# EAGLE board BSK5 (EAGLE 9.4.2)
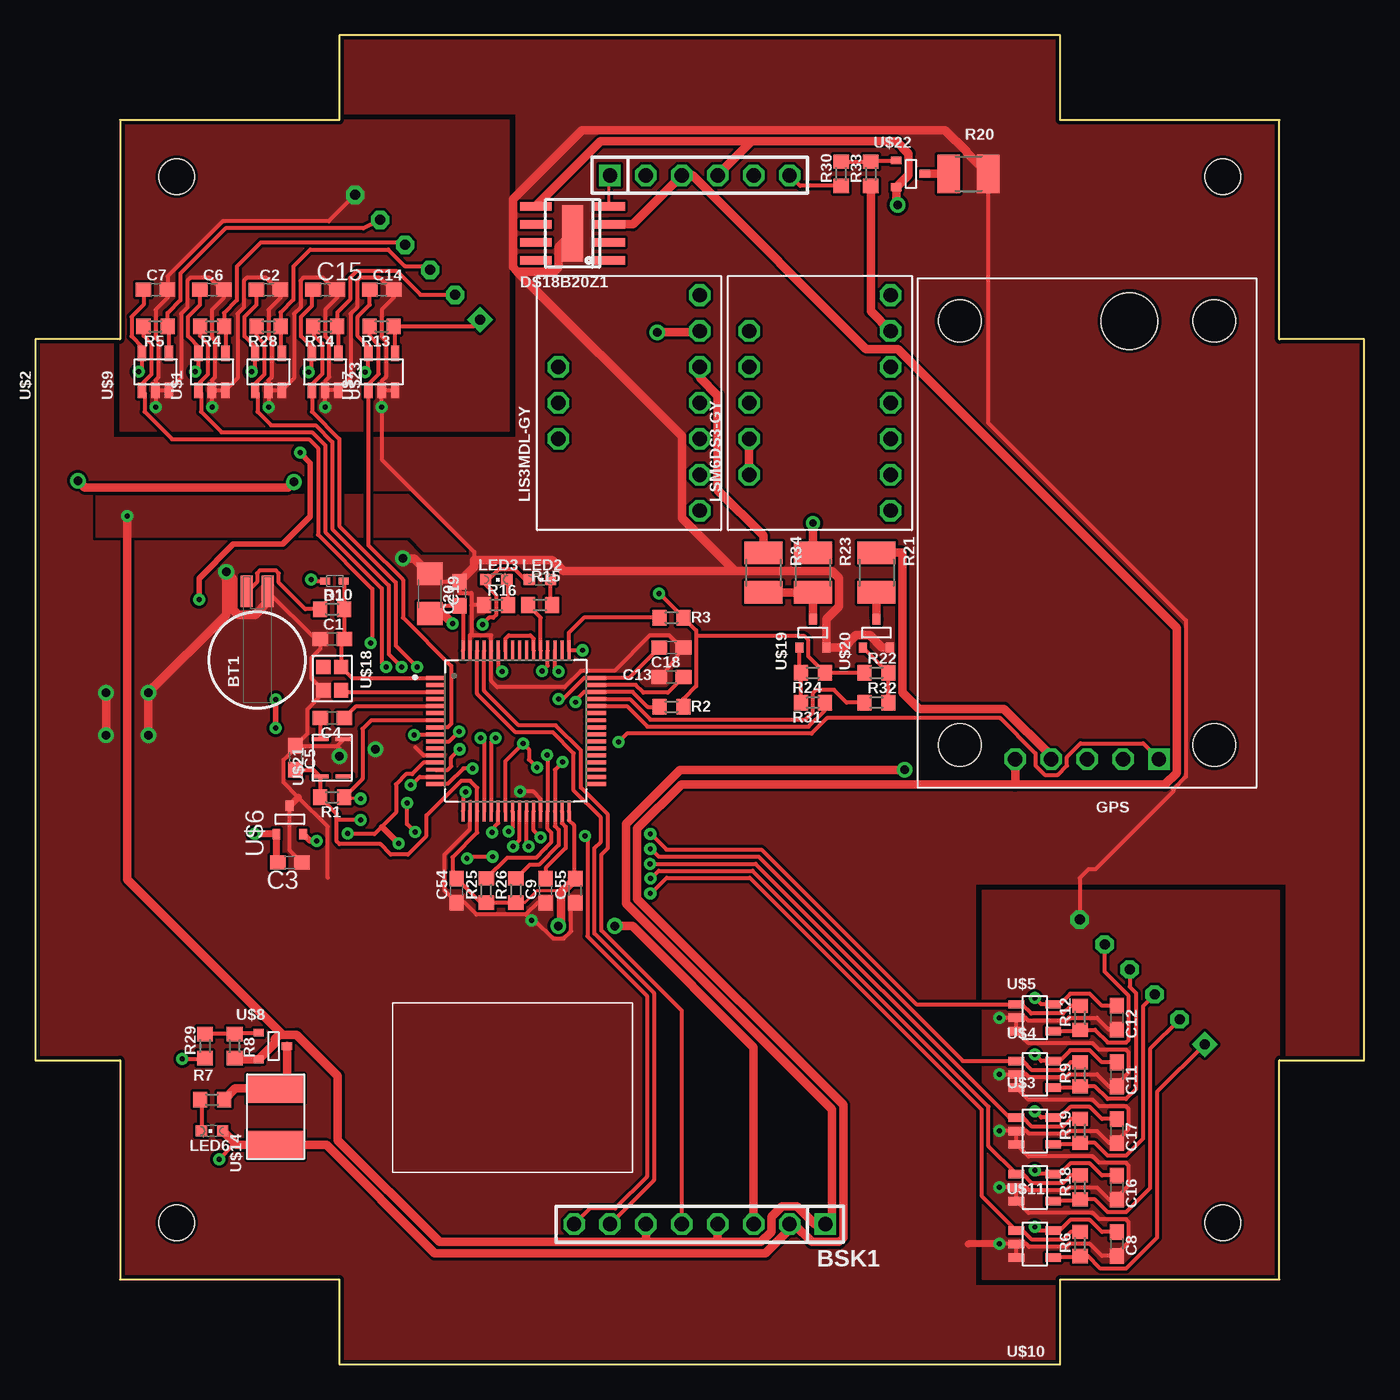
[diagram p0: board, top side]
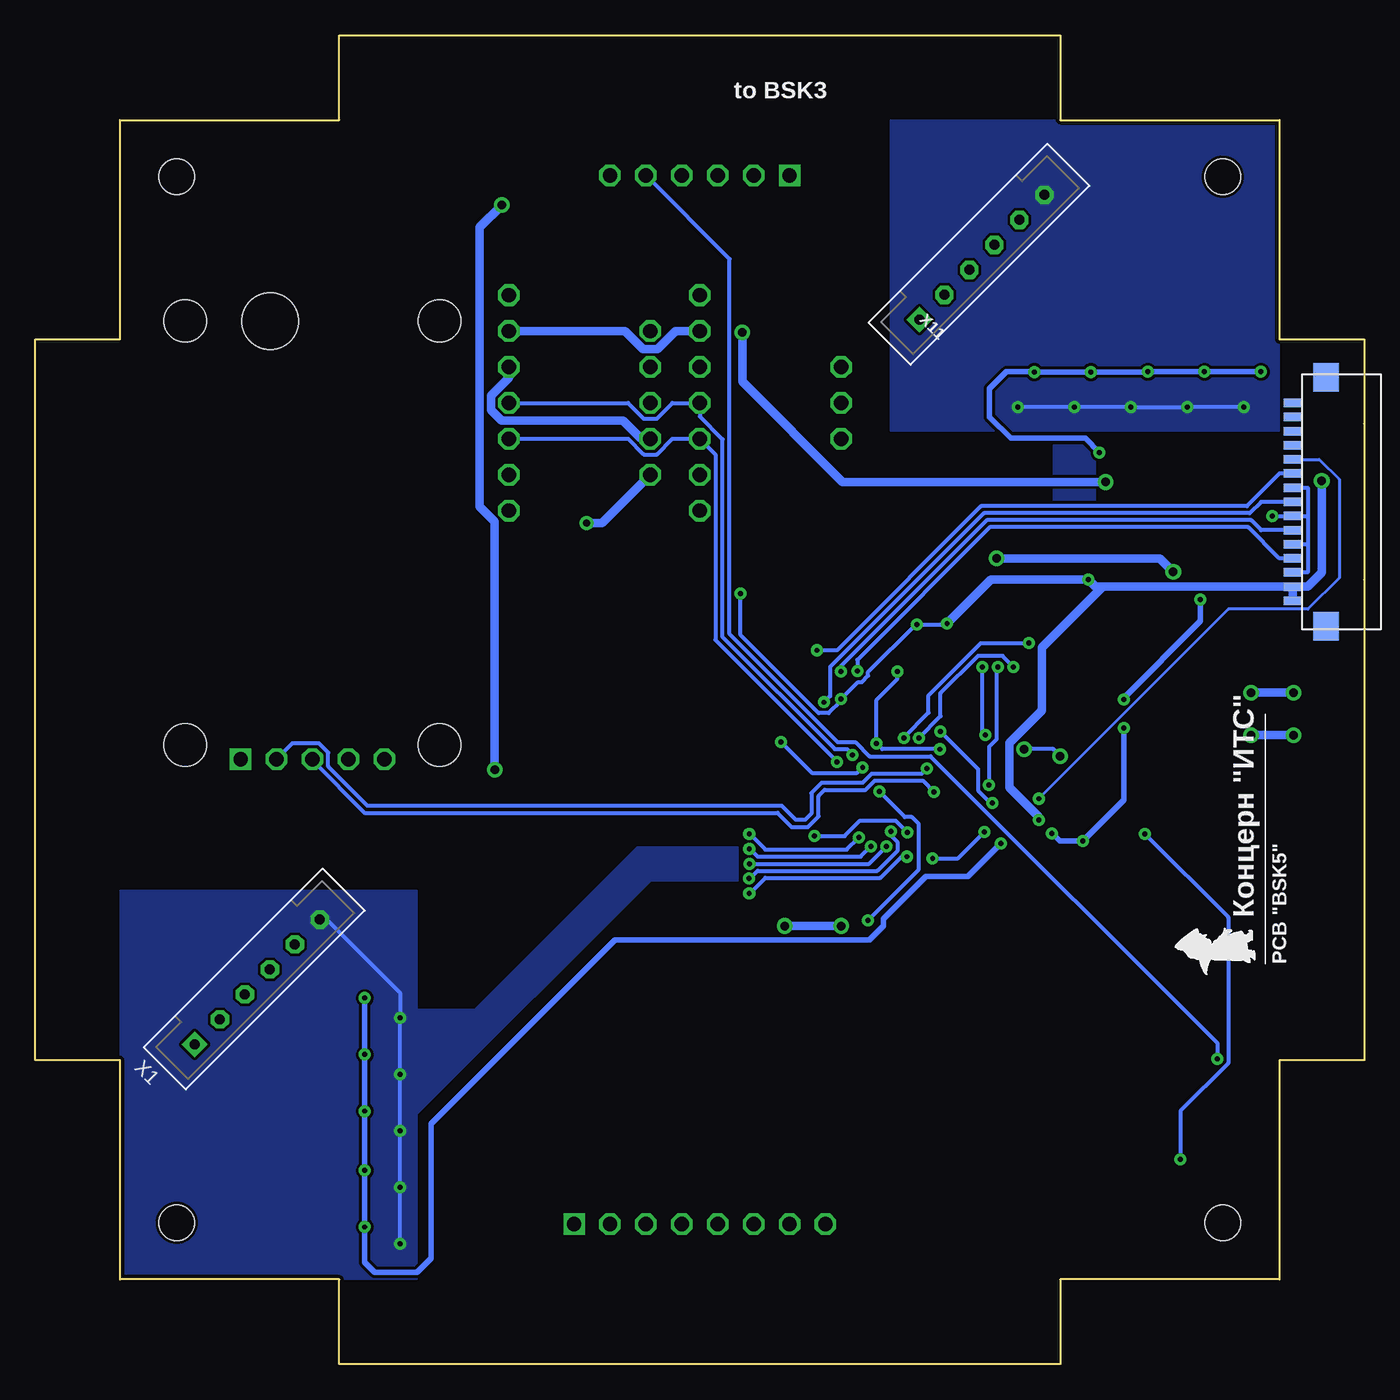
[diagram p1: board, bottom side, seen from below]

Size 94 x 94 mm. Coordinates in mm from the lower left corner, seen from the top.
Outline: 21.5,0 72.5,0 72.5,6 88,6 88,21.5 94,21.5 94,72.5 88,72.5 88,88 72.5,88 72.5,94 21.5,94 21.5,88 6,88 6,72.5 0,72.5 0,66.5 0,55.5 0,21.5 6,21.5 6,6 21.5,6 21.5,0
Copper layers (1*16): Top 0.035mm / dielectric 1.5mm / Bottom 0.035mm
Design rules "default *": minimum track width 0.2mm, minimum drill 0.35mm, track to track 0.2mm, track to pad 0.2mm, pad to pad 0.2mm, via to via 0.2mm, smd to smd 0.2mm, copper to edge 0.25mm, drill to drill 0.1mm, minimum pad ring 0.2mm, minimum via ring 0.25mm, stop-mask expansion 0.05mm, vias tented up to drill 0mil, thermal gap 10mil
Holes 2.5 mm at 10,10 84,84 10,84 84,10

## Footprints (pad centres in the part's own frame; a part is rotated, then mirrored left to right if it is on the bottom)
1X08 = drill 1.016 square: 1 -8.89,0 | drill 1.016 octagon: 2 -6.35,0; 3 -3.81,0; 4 -1.27,0; 5 1.27,0; 6 3.81,0; 7 6.35,0; 8 8.89,0
1X06 = drill 1.016 square: 1 -6.35,0 | drill 1.016 octagon: 2 -3.81,0; 3 -1.27,0; 4 1.27,0; 5 3.81,0; 6 6.35,0
BATTCON-6.8MM = smd 2.25 x 0.85: + 4.87,0.75; - 4.87,-0.75
C0603 = smd 1.1 x 1: 1 -0.85,0; 2 0.85,0
C1206 = smd 1.6 x 1.8: 1 -1.4,0; 2 1.4,0
SOD523 = smd 0.7 x 0.5: A 0.7,0; C -0.6,0
SOIC8+HEAT_S = smd 0.6 x 2.2: 1 -1.905,-2.6; 2 -0.635,-2.6; 3 0.635,-2.6; 4 1.905,-2.6; 5 1.905,2.6; 6 0.635,2.6; 7 -0.635,2.6; 8 -1.905,2.6 | smd 4 x 1.5: HEAT 0,0
GPS-NEO6M = drill 1.016 square: P$1 -5.08,16 | drill 1.016 octagon: P$2 -2.54,16; P$3 0,16; P$4 2.54,16; P$5 5.08,16 | hole 3: -9,15; 9,15; -9,-15; 9,-15 | hole 4: -3,-15
CHIPLED_0603 = smd 0.8 x 0.8: A 0,-0.75; C 0,0.75
LIS3MDL-GY = drill 1.016 octagon: P$1 -7.62,-5; P$2 -5.08,-5; P$3 -2.54,-5; P$4 0,-5; P$5 2.54,-5; P$6 5.08,-5; P$7 7.62,-5; P$8 -2.54,5; P$9 0,5; P$10 2.54,5
LSM6DS3-GY = drill 1.016 octagon: P$1 -7.62,-5; P$2 -5.08,-5; P$3 -2.54,-5; P$4 0,-5; P$5 2.54,-5; P$6 5.08,-5; P$7 7.62,-5; P$8 -5.08,5; P$9 -2.54,5; P$10 0,5; P$11 2.54,5; P$12 5.08,5
R0603 = smd 1 x 1.1: 1 -0.85,0; 2 0.85,0
R1210 = smd 1.6 x 2.7: 1 -1.4,0; 2 1.4,0
QFP50P1200X1200X160-64N = smd 1.47 x 0.28: 1 -5.67,3.75; 2 -5.67,3.25; 3 -5.67,2.75; 4 -5.67,2.25; 5 -5.67,1.75; 6 -5.67,1.25; 7 -5.67,0.75; 8 -5.67,0.25; 9 -5.67,-0.25; 10 -5.67,-0.75; 11 -5.67,-1.25; 12 -5.67,-1.75; 13 -5.67,-2.25; 14 -5.67,-2.75; 15 -5.67,-3.25; 16 -5.67,-3.75; 33 5.67,-3.75; 34 5.67,-3.25; 35 5.67,-2.75; 36 5.67,-2.25; 37 5.67,-1.75; 38 5.67,-1.25; 39 5.67,-0.75; 40 5.67,-0.25; 41 5.67,0.25; 42 5.67,0.75; 43 5.67,1.25; 44 5.67,1.75; 45 5.67,2.25; 46 5.67,2.75; 47 5.67,3.25; 48 5.67,3.75 | smd 0.28 x 1.47: 17 -3.75,-5.67; 18 -3.25,-5.67; 19 -2.75,-5.67; 20 -2.25,-5.67; 21 -1.75,-5.67; 22 -1.25,-5.67; 23 -0.75,-5.67; 24 -0.25,-5.67; 25 0.25,-5.67; 26 0.75,-5.67; 27 1.25,-5.67; 28 1.75,-5.67; 29 2.25,-5.67; 30 2.75,-5.67; 31 3.25,-5.67; 32 3.75,-5.67; 49 3.75,5.67; 50 3.25,5.67; 51 2.75,5.67; 52 2.25,5.67; 53 1.75,5.67; 54 1.25,5.67; 55 0.75,5.67; 56 0.25,5.67; 57 -0.25,5.67; 58 -0.75,5.67; 59 -1.25,5.67; 60 -1.75,5.67; 61 -2.25,5.67; 62 -2.75,5.67; 63 -3.25,5.67; 64 -3.75,5.67
LMC7101 = smd 1.1 x 0.6: P$1 -1.3,0.95; P$2 -1.3,0; P$3 -1.3,-0.95; P$4 1.3,-0.95; P$5 1.3,0.95
SOT23-3 = smd 0.56 x 0.73: 1 -0.95,-1; 2 0.95,-1; 3 0,1
68611 = smd 0.6 x 1.3: P$1 -7,0.65; P$2 -6,0.65; P$3 -5,0.65; P$4 -4,0.65; P$5 -3,0.65; P$6 -2,0.65; P$7 -1,0.65; P$8 0,0.65; P$9 1,0.65; P$10 2,0.65; P$11 3,0.65; P$12 4,0.65; P$13 5,0.65; P$14 6,0.65; P$15 7,0.65 | smd 2 x 1.8: P$16 8.8,-1.7; P$17 -8.8,-1.7
EM_HEAT = smd 2 x 4: 1 -2,0; 2 2,0
Q32.768 = smd 1 x 1: P$1 -0.825,-0.625; P$2 0.825,-0.625; P$3 0.825,0.625; P$4 -0.825,0.625
Q24 = smd 0.3 x 1.2: P$1 -1.325,-0.85; P$2 1.325,-0.85; P$3 1.325,0.85; P$4 -1.325,0.85
B6B-EH-A = drill 0.7 pad 1.3 square: 1 6.25,0 | drill 0.7 pad 1.3 octagon: 2 3.75,0; 3 1.25,0; 4 -1.25,0; 5 -3.75,0; 6 -6.25,0

## Placement (x,y rotation side)
BSK1  [1X08]  47,9.9 180 top
BSK3  [1X06]  47,84.1 0 top
BT1  6.8MM_COIN_CELL  [BATTCON-6.8MM]  15.7,49.8 90 top
C1  10nF  [C0603]  21,51.3 0 top
C2  100nF  [C0603]  16.5,76 0 top
C3  470nF  [C0603]  18,35.5 180 top
C4  1nF  [C0603]  21,45.7 180 top
C5  10nF  [C0603]  18.4,42.9 270 top
C6  100nF  [C0603]  12.5,76 0 top
C7  100nF  [C0603]  8.5,76 0 top
C8  100nF  [C0603]  76.5,8.5 270 top
C9  2,2µ  [C0603]  36.1,33.5 90 top
C11  100nF  [C0603]  76.5,20.5 270 top
C12  100nF  [C0603]  76.5,24.5 270 top
C13  2,2µ  [C0603]  45,48.6 0 top
C14  100nF  [C0603]  24.5,76 0 top
C15  100nF  [C0603]  20.5,76 0 top
C16  100nF  [C0603]  76.5,12.5 270 top
C17  100nF  [C0603]  76.5,16.5 270 top
C18  100nF  [C0603]  45,50.7 180 top
C19  10µ  [C1206]  27.9,54.5 270 top
C20  100nF  [C0603]  30,54.5 270 top
C54  100nF  [C0603]  29.8,33.5 90 top
C55  100nF  [C0603]  38.2,33.5 90 top
D1  BB141  [SOD523]  21.2,55.4 180 top
DS18B20Z1  DS18B20Z  [SOIC8+HEAT_S]  38,80 90 top
GPS  GPSNEO6M  [GPS-NEO6M]  74.4,58.8 180 top
LED2  [CHIPLED_0603]  35.7,55.5 270 top
LED3  [CHIPLED_0603]  32.6,55.5 270 top
LED6  [CHIPLED_0603]  12.5,16.5 90 top
LIS3MDL-GY  LIS3MDL-GY  [LIS3MDL-GY]  42,68 90 top
LSM6DS3-GY  LSM6DS3-GY  [LSM6DS3-GY]  55.5,68 90 top
R1  10k  [R0603]  21,40.1 180 top
R2  10k  [R0603]  45,46.5 0 top
R3  10k  [R0603]  45,52.8 0 top
R4  24k9  [R0603]  12.5,73.4 180 top
R5  24k9  [R0603]  8.5,73.4 180 top
R6  24k9  [R0603]  73.9,8.5 90 top
R7  2k  [R0603]  12.5,18.7 0 top
R8  1M  [R0603]  14.1,22.5 270 top
R9  24k9  [R0603]  73.9,20.5 90 top
R10  620R  [R0603]  21,53.4 0 top
R12  24k9  [R0603]  73.9,24.5 90 top
R13  24k9  [R0603]  24.5,73.4 180 top
R14  24k9  [R0603]  20.5,73.4 180 top
R15  2k  [R0603]  35.7,53.7 0 top
R16  2k  [R0603]  32.6,53.7 0 top
R18  24k9  [R0603]  73.9,12.5 90 top
R19  24k9  [R0603]  73.9,16.5 90 top
R20  0.5A  [R1210]  66,84.2 0 top
R21  0.2A  [R1210]  59.5,56 270 top
R22  1M  [R0603]  59.5,48.9 0 top
R23  0.05A  [R1210]  55,56 270 top
R24  1M  [R0603]  55,48.9 180 top
R25  5k1  [R0603]  31.9,33.5 90 top
R26  5k1  [R0603]  34,33.5 90 top
R28  24k9  [R0603]  16.5,73.4 180 top
R29  100R  [R0603]  12,22.5 90 top
R30  100R  [R0603]  57,84.2 90 top
R31  100R  [R0603]  55,46.8 180 top
R32  100R  [R0603]  59.5,46.8 0 top
R33  1M  [R0603]  59.1,84.2 90 top
R34  0.05A  [R1210]  51.5,56 270 top
U1  STM32F405RGT6  [QFP50P1200X1200X160-64N]  34,44.8 0 top
U$1  LMC7101  [LMC7101]  12.5,70.2 90 top
U$2  LMC7101  [LMC7101]  8.5,70.2 90 top
U$3  LMC7101  [LMC7101]  70.7,8.5 0 top
U$4  LMC7101  [LMC7101]  70.7,20.5 0 top
U$5  LMC7101  [LMC7101]  70.7,24.5 0 top
U$6  REF3033  [SOT23-3]  18,38.5 0 top
U$7  LMC7101  [LMC7101]  24.5,70.2 90 top
U$8  SI2302CDS  [SOT23-3]  16.8,22.5 270 top
U$9  LMC7101  [LMC7101]  20.5,70.2 90 top
U$10  LMC7101  [LMC7101]  70.7,12.5 0 top
U$11  LMC7101  [LMC7101]  70.7,16.5 0 top
U$12  FFC-CONNECT68611  [68611]  4.4,61 90 bottom
U$14  EM_HEAT  [EM_HEAT]  17,17.5 90 top
U$18  Q32.768  [Q32.768]  21,48.5 270 top
U$19  SI2302CDS  [SOT23-3]  55,51.7 0 top
U$20  SI2302CDS  [SOT23-3]  59.5,51.7 0 top
U$21  Q24  [Q24]  21,42.9 90 top
U$22  SI2302CDS  [SOT23-3]  61.9,84.2 270 top
U$23  LMC7101  [LMC7101]  16.5,70.2 90 top
U$26  PCB "BSK5"  [ITS-LOGO]  7,28.3 90 bottom
X1  JST-6A  [B6B-EH-A]  78.3,27.04 225 bottom
X11  JST-6A  [B6B-EH-A]  27.04,78.3 225 bottom

## Library data of the parts
BSK1 BSK3 = pinheadCS
BT1 = SparkFun-Batteries; PROD_ID: BATT-13734
C1-C9 C11-C20 C54 C55 = rcl; SPICEPREFIX: C
D1 = diode
DS18B20Z1 GPS LIS3MDL-GY LSM6DS3-GY U$1-U$12 U$14 U$18-U$23 U$26 X1 X11 = CanCubeSat
LED2 LED3 LED6 = led
R1-R10 R12-R16 R18 R19 R22 R24-R26 R28-R33 = resistor
R20 R21 R23 R34 = rcl; SPICEPREFIX: R
U1 = STM32F405RGT6; DESCRIPTION: High-performance foundation line, ARM Cortex-M4 core with DSP and FPU, 1 Mbyte Flash, 168 MHz CPU, ART Accelerator; DIGI-KEY_PART_NUMBER: 497-11767-ND; DIGI-KEY_PURCHASE_URL: https://www.digikey.com/product-detail/en/stmicroelectronics/STM32F405RGT6/497-11767-ND/2754208?utm_source=snapeda&utm_medium=aggregator&utm_campaign=symbol; MF: STMicroelectronics; MP: STM32F405RGT6; PACKAGE: LQFP-64 STMicroelectronics

## Nets
1: R7.2 U$8.3 U$14.2
1W: BSK3.1 DS18B20Z1.4
3V3: BSK1.3 C5.2 C18.2 C19.2 C20.2 C54.2 C55.2 D1.A LED2.A LED3.A LIS3MDL-GY.P$6 LSM6DS3-GY.P$6 R1.2 R2.2 R3.2 R22.1 R24.1 R25.1 R26.1 R33.1 U1.19 U1.32 U1.48 U1.64 U$12.P$1 U$12.P$2 U$21.P$4
3V3-STAB: C2.1 C6.1 C7.1 C8.1 C11.1 C12.1 C14.1 C15.1 C16.1 C17.1 U1.13 U$1.P$5 U$2.P$5 U$3.P$5 U$4.P$5 U$5.P$5 U$6.2 U$7.P$5 U$9.P$5 U$10.P$5 U$11.P$5 U$23.P$5
5V: BSK1.2 BSK3.3 C3.2 DS18B20Z1.3 GPS.P$5 LED6.A U$6.1 U$14.1
B5-KHEAT: BSK3.5 R29.1
BUS+: BSK3.2
CELL: C1.2 D1.C R10.2 U1.1 U$18.P$4
GND: BT1.- C1.1 C2.2 C3.1 C5.1 C6.2 C7.2 C8.2 C9.1 C11.2 C12.2 C13.1 C14.2 C15.2 C16.2 C17.2 C18.1 C19.1 C20.1 C54.1 C55.1 DS18B20Z1.HEAT R16.1 R20.2 U1.12 U1.18 U1.28 U1.60 U1.63 U$1.P$2 U$1.P$3 U$2.P$2 U$2.P$3 U$3.P$2 U$3.P$3 U$4.P$2 U$4.P$3 U$5.P$2 U$5.P$3 U$6.3 U$7.P$2 U$7.P$3 U$9.P$2 U$9.P$3 U$10.P$2 U$10.P$3 U$11.P$2 U$11.P$3 U$18.P$2 U$19.2 U$20.2 U$21.P$2 U$23.P$2 U$23.P$3 X1.6 X11.6
GND-GPS: R21.2 U$20.3
GND-MAG: R23.2 R34.2 U$19.3
GND-OUT: BSK1.1 BSK1.4 BSK1.6 BSK3.4 DS18B20Z1.5 R8.2 U$8.2 U$12.P$3 U$12.P$5 U$12.P$7 U$12.P$9 U$22.2
GPS: R32.1 U1.45
MAG: R31.1 U1.44
N$1: U1.3 U$18.P$3
N$2: R20.1 U$22.3
N$4: R13.1 U$7.P$4 X11.1
N$5: R6.1 U$3.P$4 X1.1
N$6: R9.1 U$4.P$4 X1.4
N$7: R8.1 R29.2 U$8.1
N$10: R30.2 R33.2 U$22.1
N$11: R24.2 R31.2 U$19.1
N$12: LSM6DS3-GY.P$5 LSM6DS3-GY.P$8 LSM6DS3-GY.P$9 R23.1
N$13: R22.2 R32.2 U$20.1
N$14: LIS3MDL-GY.P$5 R34.1
N$26: BT1.+ R10.1
N$27: GPS.P$4 R21.1
N$28: U1.54 U1.58
N$29: C13.2 U1.47
N$30: R4.1 U$1.P$4 X11.4
N$31: R5.1 U$2.P$4 X11.5
N$33: LED6.C R7.1
N$35: R12.1 U$5.P$4 X1.5
N$36: C9.2 U1.31
N$37: LED2.C R15.2
N$38: R15.1 U1.53
N$40: LED3.C R16.2
N$41: GPS.P$2 U1.16
N$42: GPS.P$3 U1.17
N$43: C4.2 U$21.P$3
N$44: C4.1 U1.5
N$45: R28.1 U$23.P$4 X11.3
N$46: R14.1 U$9.P$4 X11.2
N$47: R18.1 U$10.P$4 X1.2
N$48: R19.1 U$11.P$4 X1.3
NRST: R1.1 U1.7 U$12.P$11
RX-S: U1.52 U$12.P$4
SCL: LIS3MDL-GY.P$4 LSM6DS3-GY.P$4 R25.2 U1.29
SCL-TM: BSK1.5 U1.61
SDA: LIS3MDL-GY.P$3 LSM6DS3-GY.P$3 R26.2 U1.30
SDA-TM: BSK1.7 U1.62
SINS-KVCC: BSK3.6 R30.1
SS1: R28.2 U1.15 U$23.P$1
SS2: R4.2 U1.20 U$1.P$1
SS3: R5.2 U1.21 U$2.P$1
SS4: R6.2 U1.10 U$3.P$1
SS5: R9.2 U1.26 U$4.P$1
SS6: R12.2 U1.27 U$5.P$1
SS7: R13.2 U1.8 U$7.P$1
SS8: R14.2 U1.9 U$9.P$1
SS9: R18.2 U1.24 U$10.P$1
SS10: R19.2 U1.25 U$11.P$1
SWC: R3.1 U1.49 U$12.P$10
SWD: R2.1 U1.46 U$12.P$8
TIME-ES: BSK1.8 U1.22
TIME-G: GPS.P$1 U1.14 U1.23 U1.59
TX-S: U1.51 U$12.P$6

## Tracks (layer width: path | path; a pad name or v marks a point on that pad's centre or on a via)
1
  Top 0.6: U$8.3 17.8,19.7 18,19.5 U$14.2 14.15,19.5 R7.2
1W
  Top 0.2: DS18B20Z1.4 40.6,84.05 BSK3.1
3V3  (via drill 0.35, 0.6)
  Top 0.2: R26.1 34.63,32.65 35.48,33.5 37.11,33.5 37.2,33.41
  Top 0.3: R22.1 R24.1 54.68,50.07 54.68,51.21 54.39,51.5 46.75,51.5 | C5.2 19.68,42.05 U$21.P$4 R1.2 21.32,38.94 21.32,38.5 | U1.64 30.25,53.4 C20.2 28.45,53.65 C19.2 | R26.1 R25.1 31.5,32.65 C54.2 29.5,34.65 29.5,35.85 31.25,37.6 U1.19 31.25,40.78 30.76,41.27 30.12,41.27 27.68,38.82 27.68,37.37 26.36,36.05 25.14,36.05 24.41,36.78 21.52,36.78 21.32,36.99 21.32,38.5 | R2.2 45.85,47.05 46.75,47.95 46.75,51.5 | C18.2 42,48.55 U1.48 38.82,48.55 37.32,47.05 v37,47.05 | 46.75,51.5 46.75,51.9 R3.2 44.15,54.5 v44.11,54.5 | U1.32 37.75,38.48 38.1,38.13 38.1,34.45 C55.2 | v19.5,55.5 19.6,55.4 D1.A | LED2.A 34.65,55.5 33.9,56.25 32.8,56.25 32.05,55.5 LED3.A 31.85,55.15 32.6,54.4 32.6,53.01 32.4,52.8 32.09,52.8 v31.62,52.33 | v23,38.5 21.32,38.5
  Top 0.6: LSM6DS3-GY.P$6 59.1,74.48 R33.1 | v29.5,52.4 28.8,53.1 C19.2 | v37,31 37.2,31 37.2,33.41 37.49,33.7 37.55,33.7 C55.2 | v3,62.5 3.5,62 17.9,62 v18.3,62.4 | v43.99,73 46.92,73 LIS3MDL-GY.P$6 | v41,31 42.23,31 50.81,22.42 BSK1.3
  Bottom 0.3: v29.5,52.4 29.57,52.33 v31.62,52.33 31.72,52.33 35.09,48.97 35.09,48.71 35.54,48.26 35.8,48.26 v37,47.05 37,46.93 37.88,46.05 38.59,46.05 44.11,51.58 v44.11,54.5
  Bottom 0.6: LSM6DS3-GY.P$6 52.28,73.08 51.02,71.82 49.98,71.82 48.72,73.08 LIS3MDL-GY.P$6 | U$12.P$1 U$12.P$2 | U$12.P$2 18.5,55 | 18.5,55 19,55 v19.5,55.5 26.4,55.5 v29.5,52.4 | v41,31 v37,31 | U$12.P$2 4,55 3,56 v3,62.5 | v18.3,62.4 36.9,62.4 43.99,69.49 v43.99,73 | 18.5,55 22.8,50.7 22.8,46.23 25.1,43.94 25.1,40.79 23,38.69 v23,38.5
3V3-STAB  (via drill 0.35)
  Top 0.3: U1.13 27.48,42.55 26.66,41.73 26.22,41.73 25.51,41.02 25.51,39.01 24.5,38 24,37.5 22.15,37.5 v22.09,37.56 | C8.1 75.44,9.35 74.59,10.2 73.2,10.2 72.36,9.35 72.1,9.35 U$3.P$5 70.95,9.45 v70.7,9.7 | C16.1 75.44,13.35 74.59,14.2 73.2,14.2 72.45,13.45 U$10.P$5 70.95,13.45 v70.7,13.7 | C17.1 75.44,17.35 74.59,18.2 73.2,18.2 72.45,17.45 U$11.P$5 71.15,17.45 v70.7,17.9 | C11.1 75.44,21.35 74.59,22.2 73.2,22.2 72.36,21.35 72.1,21.35 U$4.P$5 71.15,21.45 v70.7,21.9 | C12.1 75.44,25.35 74.59,26.2 73.2,26.2 72.36,25.35 72.1,25.35 U$5.P$5 71.15,25.45 v70.7,25.9 | C14.1 23.65,74.94 22.8,74.09 22.8,72.7 23.65,71.86 23.65,71.6 U$7.P$5 23.55,70.39 v23.33,70.17 | C15.1 19.57,75.92 19.57,74.87 18.8,74.09 18.8,72.7 19.57,71.93 19.57,71.53 U$9.P$5 19.55,70.39 v19.33,70.17 | C2.1 15.65,74.94 14.8,74.09 14.8,72.7 15.65,71.86 15.65,71.6 U$23.P$5 15.55,70.45 v15.3,70.2 | C6.1 11.65,74.94 10.8,74.09 10.8,72.7 11.65,71.86 11.65,71.6 U$1.P$5 11.55,70.45 v11.3,70.2 | C7.1 7.65,74.94 6.8,74.09 6.8,72.7 7.55,71.95 U$2.P$5 7.55,70.45 v7.3,70.2
  Top 0.4: U$6.2 19.45,37 v19.91,37 | v16.99,44.99 16.99,46.99 v17.01,47.01 | v11.57,54.08 11.57,55.58 14,58 17.5,58 19.45,59.95 19.45,63.75 v18.72,64.48 | 24.5,38 24.52,38 v25.7,36.83
  Bottom 0.4: v22.09,37.56 21.53,37 v19.91,37 16.99,39.92 v16.99,44.99 | v17.01,47.01 17.01,47.14 11.57,52.58 v11.57,54.08 | v18.72,64.48 19.74,65.5 25,65.5 26.5,67 26.5,69 25.3,70.2 23.36,70.2 v23.33,70.17 v19.33,70.17 15.33,70.17 v15.3,70.2 v11.3,70.2 v7.3,70.2 | v25.7,36.83 28.02,34.5 31,34.5 34,31.5 34,31 35,30 53,30 66,17 66,7.5 67,6.5 70,6.5 70.7,7.2 v70.7,9.7 v70.7,13.7 v70.7,17.9 v70.7,21.9 v70.7,25.9
5V  (via drill 0.35)
  Top 0.3: v13,14.5 14,15.5 14.25,15.5
  Top 0.5: v15.5,37.5 U$6.1 17.05,35.6 C3.2
  Top 0.6: LED6.A 14.25,15.5 U$14.1 20.59,15.5 28.26,7.84 51.66,7.84 53.35,9.52 BSK1.2 53.66,9.9 54.92,8.64 56.86,8.64 57.15,8.93 57.15,18.34 42.57,32.92 42.57,37.88 45.69,41 69.32,41 | DS18B20Z1.3 42.27,80.64 BSK3.3 46.48,84.1 58.77,71.82 61.01,71.82 80.74,52.08 80.74,41.83 79.91,41 69.32,41 | GPS.P$5 69.32,41
  Bottom 0.3: v13,14.5 13,17.9 9.62,21.28 9.62,31.62 v15.5,37.5
B5-KHEAT  (via drill 0.35)
  Top 0.3: v10.4,21.6 11.95,21.6 R29.1
  Bottom 0.3: BSK3.5 44.89,78.18 44.89,51.64 37.24,44 35.99,44 34.99,43 30.67,43 10.4,22.73 v10.4,21.6
CELL
  Top 0.3: D1.C 21.85,55.35 R10.2 C1.2 21.62,51.08 U$18.P$4 22.4,48.55 U1.1
GND  (via drill 0.35, 0.6)
  Top 0.3: U$7.P$2 U$7.P$3 | U$9.P$2 U$9.P$3 22.3,69.75 22.3,74.3 22.75,74.75 22.75,76.64 22.95,76.85 24.34,76.85 25.2,76 C14.2 25.35,75.44 24.5,74.59 24.5,72.7 24.8,72.41 24.8,69.84 24.5,69.54 U$7.P$2 | U$7.P$2 v24.5,67.7 24.5,64 31.05,57.45 31.05,56.9 | v20.5,67.7 U$9.P$2 | U$9.P$2 20.5,69.54 20.8,69.84 20.8,72.41 20.5,72.7 20.5,74.59 21.35,75.44 C15.2 21.2,76 20.34,76.85 18.95,76.85 18.75,76.64 18.75,74.75 18.3,74.3 18.3,69.75 U$23.P$3 U$23.P$2 | U$1.P$2 12.5,69.6 12.7,69.8 12.7,72.4 12.5,72.6 12.5,74.59 13.35,75.44 C6.2 13.2,76 12.35,76.85 10.96,76.85 10.75,76.64 10.75,74.75 10.3,74.3 10.3,69.75 U$2.P$3 U$2.P$2 | U$2.P$2 8.5,69.6 8.7,69.8 8.7,72.4 8.5,72.6 8.5,74.59 9.35,75.44 C7.2 9.35,76.95 13.25,80.85 20.75,80.85 X11.6 | U$1.P$2 U$1.P$3 14.3,69.75 14.3,74.3 14.75,74.75 14.75,76.64 14.96,76.85 16.34,76.85 17.2,76 C2.2 17.35,75.44 16.5,74.59 16.5,72.6 16.7,72.4 16.7,69.8 16.5,69.6 U$23.P$2 | U$2.P$2 v8.5,67.7 | v12.5,67.7 U$1.P$2 | U$23.P$2 v16.5,67.7 | U$3.P$3 U$3.P$2 | U$5.P$2 U$5.P$3 70.25,22.7 74.8,22.7 75.25,22.25 77.14,22.25 77.35,22.05 77.35,20.66 76.5,19.8 C11.2 75.94,19.65 75.09,20.5 73.1,20.5 72.9,20.3 70.3,20.3 70.1,20.5 U$4.P$2 | U$4.P$2 U$4.P$3 70.25,18.7 74.8,18.7 75.25,18.25 77.14,18.25 77.35,18.05 77.35,16.66 76.5,15.8 C17.2 75.94,15.65 75.09,16.5 73.1,16.5 72.9,16.3 70.3,16.3 70.1,16.5 U$11.P$2 | U$11.P$2 U$11.P$3 70.25,14.7 74.8,14.7 75.25,14.25 77.14,14.25 77.35,14.04 77.35,12.65 76.5,11.8 C16.2 75.94,11.65 75.09,12.5 73.1,12.5 72.9,12.3 70.3,12.3 70.1,12.5 U$10.P$2 | U$10.P$2 U$10.P$3 70.25,10.7 74.8,10.7 75.25,10.25 77.14,10.25 77.35,10.04 77.35,8.65 76.5,7.8 C8.2 75.44,7.65 74.59,8.5 73.1,8.5 72.9,8.3 70.3,8.3 70.1,8.5 U$3.P$2
  Top 0.3: C12.2 75.94,23.65 75.09,24.5 73.1,24.5 72.9,24.3 70.24,24.3 70.04,24.5 U$5.P$2 | U$5.P$2 v68.2,24.5 | v68.2,20.5 U$4.P$2 | U$11.P$2 v68.2,16.5 | U$10.P$2 v68.2,12.5 | U$3.P$2 v68.2,8.5 | U$21.P$2 21.35,43.73 | BT1.- 19.82,51.3 C1.1 20.15,50.59 19.52,49.97 19.52,48.52 U$18.P$2 20.38,47.47 19.25,46.34 19.25,44.6 C5.1 | U1.12 27.48,43.05 26.88,43.65 | 20.68,34.4 20.68,38.02 18.6,40.1 17.55,41.16 17.55,42.74 18.4,43.59 C5.1 | U1.18 30.75,37.84 28.95,36.05 28.95,33.5 C54.1 30.36,32.65 31.2,31.8 34.7,31.8 | C9.1 35.55,32.65 34.7,31.8 | 34.7,31.8 v35.1,31.4 35.33,31.4 36.63,30.1 37.37,30.1 37.9,30.63 37.9,32.35 C55.1 | C13.1 44.49,48.94 C18.1 45.7,50.7 44.84,51.55 43.45,51.55 40.95,49.05 38.59,49.05 37.44,47.9 32.68,47.9 32.25,48.33 U1.60 32.25,51.55 30.85,51.55 | C19.1 27.9,55.35 C20.1 30,54.55 30.85,54.55 30.85,53.7 | R16.1 30.85,53.7 | 30.85,53.7 30.85,51.55 | 30.85,51.55 30.75,51.55 U1.63 | U1.28 35.75,39.98 35.23,40.5 v34.3,40.5 | C5.1 18.43,43.73 21.35,43.73 | 21.35,43.73 21.5,43.58 v21.5,43 | R20.2 67.4,66.6 81.39,52.61 81.39,41.56 80.5,40.67 80.5,40.5 75,35 74.5,35 73.88,34.38 X1.6 | C3.1 18,36.35 U$6.3
  Top 0.5: v68.2,8.5 66,8.5 | U$6.3 18.6,40.1
  Top 0.6: U$20.2 59.9,50.7 59.04,51.56 58.06,51.56 57.2,50.7 U$19.2 55.95,52.69 56.85,53.59 56.85,55.61 56.36,56.1 49.49,56.1 | 34.09,77.3 33.8,77.59 33.8,82.41 38.69,87.3 64.36,87.3 65.9,85.76 65.9,85.7 R20.2 | 34.09,77.3 36.71,77.3 37,77.59 37,79 DS18B20Z1.HEAT | 34.09,77.3 45.74,65.65 45.74,59.86 49.49,56.1 | 49.49,56.1 37.36,56.1 36.56,56.9 31.05,56.9 31.05,56.4 C20.1 | C19.1 26.8,57 v26,57 | BT1.- 16.45,53.91 15.54,53 14.36,53 14,53.36 14,55.55 v13.5,56.05 13.5,53 v8,47.5 v8,44.5 | v5,47.5 v5,44.5
  Bottom 0.3: v8.5,67.7 v12.5,67.7 v16.5,67.7 v20.5,67.7 v24.5,67.7 | v68.2,8.5 v68.2,12.5 v68.2,16.5 v68.2,20.5 v68.2,24.5 68.2,26.28 73.38,31.46 X1.6 | v35.1,31.4 31.5,35 31.5,38.2 32,38.7 32.5,38.7 v34.3,40.5 | v21.5,43 22,43.5 v24.05,43.5
  Bottom 0.6: v26,57 14.45,57 v13.5,56.05 | v8,47.5 v5,47.5 | v5,44.5 v8,44.5
  pour Bottom (no thermals): 6,88 6,66 33.5,66 33.5,88
  pour Bottom (no thermals): 88,6 88,33.5 70,33.5 67,33.5 67,15 67,6
  pour Bottom (no thermals): 44.3,36.6 51.4,36.6 62.9,25.1 67,25.1 67,17.7 50.5,34.2 44.3,34.2
  pour Bottom (no thermals): 19,65 22,65 22,61 19,61
  pour Top (no thermals): 33.5,88 6,88 6,66 33.5,66
  pour Top (rank 2, no thermals): 6,21.5 6,6 21.5,6 21.5,0 72.5,0 72.5,5.5 66.5,5.5 66.5,34 88.5,34 88.5,21.5 94,21.5 94,72.5 88,72.5 88,88 72.5,88 72.5,94 21.5,94 21.5,88.5 34,88.5 34,65.5 5.5,65.5 5.5,72.5 0,72.5 0,21.5
  pour Top (no thermals): 88,33.5 67,33.5 67,6 88,6
GND-GPS
  Top 0.6: U$20.3 R21.2
GND-MAG
  Top 0.6: U$19.3 R23.2 R34.2
GND-OUT  (via drill 0.35, 0.6)
  Top 0.6: 50.67,86.5 60.9,86.5 61.77,85.64 61.77,84.11 U$22.2 60.9,82.1 v61,82 | 50.67,86.5 BSK3.4 | R8.2 14.2,21.55 U$8.2 16.93,22.68 16.93,22.99 17.25,23.3 17.5,23.3 | DS18B20Z1.5 39.99,86.5 50.67,86.5 | 43.19,8.64 48.27,8.64 | BSK1.6 43.19,8.64 | BSK1.4 48.27,8.64 | 48.27,8.64 51.33,8.64 52.07,9.38 52.07,9.48 52.09,9.5 52.09,10.42 52.83,11.16 53.87,11.16 55.13,9.9 BSK1.1 56.35,10.36 56.35,18.01 41.77,32.59 41.77,38.21 45.61,42.05 v61.5,42.05 | v6.5,60 6.5,34.3 17.5,23.3 | 17.5,23.3 18.5,23.3 21.39,20.41 21.39,15.83 28.59,8.64 43.19,8.64
  Bottom 0.3: U$12.P$9 4,62 4,60 | U$12.P$3 4,56 4,58 | 4,60 4,58 | U$12.P$5 4,58 | 4,60 U$12.P$7 v6.5,60
  Bottom 0.6: v61.5,42.05 61.5,59.59 62.56,60.66 62.56,80.44 v61,82
  pour Top (no thermals): 4.3,61.5 27,61.5 31,57.5 27.5,57.5 26.5,58.5 4.3,58.5
GPS
  Top 0.3: R32.1 57.4,46.8 56.49,47.7 55.2,47.7 55,47.49 55,46.1 54.49,45.6 43.51,45.6 42.05,47.05 U1.45
MAG
  Top 0.3: U1.44 41.85,46.55 43.3,45.1 54.7,45.1 55.85,46.25 R31.1
N$1
  Top 0.3: U$18.P$3 21.75,47.55 U1.3
N$2
  Top 0.6: U$22.3 R20.1
N$4
  Top 0.3: U$7.P$4 25.45,73.3 R13.1 30.98,73.4 X11.1
N$5
  Top 0.3: U$3.P$4 73.8,7.55 R6.1 74.45,7.65 75.36,6.75 77.14,6.75 79.35,8.96 79.35,19.25 X1.1
N$6
  Top 0.3: U$4.P$4 73.8,19.55 R9.1 74.95,19.65 75.86,18.75 77.14,18.75 77.85,19.45 77.85,26.25 77.41,26.69 X1.4
N$7
  Top 0.3: R29.2 R8.1 14.2,23.45 U$8.1
N$10
  Top 0.3: R30.2 R33.2 59.2,85.15 U$22.1
N$11
  Top 0.3: R31.2 R24.2 54.05,49 U$19.1
N$12  (via drill 0.5)
  Top 0.3: 50.5,63 LSM6DS3-GY.P$8
  Top 0.6: R23.1 v55,59.5 | LSM6DS3-GY.P$9 50.5,63
  Bottom 0.6: LSM6DS3-GY.P$9 51.15,65.46 52.43,66.74 61.02,66.74 61.76,67.48 61.76,68.52 60.5,69.78 LSM6DS3-GY.P$5 | v55,59.5 53.92,59.5 LSM6DS3-GY.P$8
N$13
  Top 0.3: R32.2 R22.2 U$20.1
N$14
  Top 0.6: R34.1 51.5,58.61 48.26,61.85 48.26,68.52 47,69.78 LIS3MDL-GY.P$5
N$26
  Top 0.3: R10.1 19.1,53.4 17.23,55.27 17.23,55.94 17.02,56.15 15.88,56.15 15.68,55.94 15.68,55.32 15.03,54.67 BT1.+
N$27
  Top 0.6: GPS.P$4 71.86,43.01 68.52,46.35 62.5,46.35 61.35,47.5 61.35,57.4 R21.1
N$28
  Top 0.3: U1.54 35.25,51.32 35.01,51.55 33.49,51.55 33.25,51.32 U1.58
N$29
  Top 0.3: C13.2 44.75,47.5 43.02,47.5 42.47,48.05 U1.47
N$30
  Top 0.3: U$1.P$4 13.45,73.3 R4.1 13.35,74.35 14.25,75.25 14.25,77.64 15.96,79.35 25.98,79.35 X11.4
N$31
  Top 0.3: U$2.P$4 9.45,73.3 R5.1 9.35,74.35 10.25,75.25 10.25,77.14 13.46,80.35 23.22,80.35 X11.5
N$33
  Top 0.3: R7.1 11.75,18.6 LED6.C
N$35
  Top 0.3: U$5.P$4 73.8,23.55 R12.1 74.95,23.65 75.86,22.75 77.14,22.75 77.35,22.95 77.35,26.05 75.64,27.75 X1.5
N$36
  Top 0.3: C9.2 36.1,35.09 37.52,36.51 37.52,38.01 37.25,38.27 U1.31
N$37
  Top 0.3: R15.2 36.45,53.8 LED2.C
N$38
  Top 0.3: U1.53 35.75,52.8 R15.1
N$40
  Top 0.3: R16.2 33.45,55.4 LED3.C
N$41  (via drill 0.35)
  Top 0.3: v30.91,42.15 30.28,42.15 29.18,41.05 U1.16
  Bottom 0.3: GPS.P$2 75.83,43.91 73.94,43.91 73.29,43.26 73.29,42.29 70.5,39.5 41.2,39.5 40.2,38.5 39.55,38.5 39.1,38.95 39.1,40.4 38.38,41.12 35.48,41.12 34.83,41.77 31.29,41.77 v30.91,42.15
N$42  (via drill 0.35)
  Top 0.3: v30.44,40.49 30.25,40.3 U1.17
  Bottom 0.3: v30.44,40.49 31.23,41.27 34.62,41.27 35.27,40.62 38.17,40.62 38.6,40.19 38.6,38.75 39.35,38 40.5,38 41.5,39 70.71,39 74.4,42.69 GPS.P$3
N$43
  Top 0.3: C4.2 U$21.P$3
N$44
  Top 0.3: C4.1 22.7,46.55 U1.5
N$45
  Top 0.3: U$23.P$4 17.35,71.6 R28.1 17.35,74.4 18.25,75.3 18.25,77.64 19.45,78.85 24.97,78.85 26.14,77.68 27.65,77.68 X11.3
N$46
  Top 0.3: U$9.P$4 21.45,73.3 R14.1 21.35,74.4 22.25,75.3 22.25,76.85 22.75,77.35 25.55,77.35 27.25,75.64 X11.2
N$47
  Top 0.3: U$10.P$4 73.8,11.55 R18.1 74.95,11.65 75.86,10.75 77.14,10.75 78.85,12.46 78.85,22.29 X1.2
N$48
  Top 0.3: U$11.P$4 73.8,15.55 R19.1 74.95,15.65 75.86,14.75 77.14,14.75 78.35,15.96 78.35,25.32 X1.3
NRST  (via drill 0.35)
  Top 0.2: v23,40 22,40 21.88,40.12
  Top 0.3: R1.1 21.88,40.12 23.15,41.4 23.15,44.95 23.75,45.55 U1.7
  Bottom 0.2: v23,40 9.6,53.4 3.98,53.4 1.77,55.6 1.77,62.6 3.18,64 U$12.P$11
RX-S  (via drill 0.35)
  Top 0.3: v35.86,49.03 36.25,49.42 U1.52
  Bottom 0.3: U$12.P$4 6,57 8.2,59.2 26.48,59.2 35.86,49.82 v35.86,49.03
SCL  (via drill 0.35)
  Top 0.3: R25.2 33.38,35.83 35.42,35.83 36.1,36.5 36.1,36.53 36.52,36.95 36.52,37.59 36.25,37.86 U1.29 36.25,43.05 v36.2,43.1
  Bottom 0.3: LSM6DS3-GY.P$4 52.07,68 50.96,66.89 50.04,66.89 48.93,68 LIS3MDL-GY.P$4 47,67.03 45.39,65.42 45.39,51.44 37.45,43.5 36.6,43.5 v36.2,43.1
SCL-TM
  Top 0.3: U1.61 31.75,47.62 34.19,45.19 36.81,45.19 38.59,43.41 38.59,40.79 40.5,38.87 40.5,36.5 40.05,36.05 40.05,30.68 45.73,25 BSK1.5
SDA  (via drill 0.35)
  Top 0.3: R26.2 34.98,35.33 35.63,35.33 37.02,36.71 37.02,37.8 36.75,38.06 U1.30 36.75,42.05 v37.3,42.6
  Bottom 0.3: LSM6DS3-GY.P$3 52.07,65.46 50.96,64.35 50.04,64.35 48.93,65.46 LIS3MDL-GY.P$3 45.89,64.35 45.89,51.23 37.3,42.64 v37.3,42.6
SDA-TM
  Top 0.3: U1.62 31.25,47.41 33.98,44.69 36.61,44.69 38.09,43.21 38.09,40.58 40,38.66 40,36.95 39.55,36.5 39.55,30.47 43.76,26.26 43.76,13.01 BSK1.7
SINS-KVCC
  Top 0.3: R30.1 54.1,83.35 BSK3.6
SS1  (via drill 0.35)
  Top 0.3: R28.2 15.65,72.75 16.2,72.19 16.2,70 15.55,69.35 U$23.P$1 15.72,68.72 15.72,67.38 16.68,66.42 19.82,66.42 21,65.24 21,59.09 25,55.09 25,50.23 v25.9,49.33 | U1.15 27.19,41.55 26.6,40.96 v26.54,40.96
  Bottom 0.3: v25.9,49.33 26.02,49.2 26.02,44.18 26.54,43.66 v26.54,40.96
SS2  (via drill 0.35)
  Top 0.3: R4.2 11.65,72.75 12.2,72.19 12.2,70 11.65,69.45 11.65,69 U$1.P$1 11.72,68.72 11.72,67.38 13.18,65.92 19.57,65.92 20.5,65 20.5,58.88 24.5,54.88 24.5,49.63 v24.81,49.33 | v31.5,44.3 31.75,44.05 U1.20
  Bottom 0.3: v24.81,49.33 25.58,50.1 27.32,50.1 29.96,47.46 29.96,45.84 v31.5,44.3
SS3  (via drill 0.35)
  Top 0.3: R5.2 7.65,72.75 8.2,72.19 8.2,70 7.65,69.45 7.65,69 U$2.P$1 7.72,68.72 7.72,67.38 9.68,65.42 19.37,65.42 20,64.79 20,58.67 23.84,54.84 23.84,51.11 v23.73,51 | v32.55,44.3 32.25,44 U1.21
  Bottom 0.3: v23.73,51 27.13,51 30.81,47.31 30.81,46.08 32.55,44.35 v32.55,44.3
SS4  (via drill 0.35)
  Top 0.3: R6.2 73.25,9.35 72.69,8.8 70.5,8.8 69.85,9.45 U$3.P$1 66.92,11.93 66.92,18.01 50.54,34.4 44.66,34.4 43.56,33.3 v43.5,33.3 | U1.10 29.27,44.05 v29.96,44.74 | v32.34,35.9 30.64,35.9 v30.52,35.78 | v26.86,37.64 26.29,38.21 v26.29,39.71
  Bottom 0.3: v43.5,33.3 43.46,33.3 42.36,34.4 34.22,34.4 32.53,36.09 v32.34,35.9 | v29.96,44.74 27.32,42.09 27.32,40.58 26.45,39.71 v26.29,39.71 | v30.52,35.78 28.72,35.78 v26.86,37.64
SS5  (via drill 0.35)
  Top 0.3: R9.2 73.25,21.35 72.69,20.8 70.5,20.8 69.85,21.45 U$4.P$1 65.61,21.45 51.16,35.9 44.09,35.9 43.54,36.45 v43.5,36.45 | v34.9,36.63 34.75,36.77 U1.26
  Bottom 0.3: v34.9,36.63 35.62,35.9 42.9,35.9 43.45,36.45 v43.5,36.45
SS6  (via drill 0.35)
  Top 0.3: R12.2 73.25,25.35 72.69,24.8 70.44,24.8 69.8,25.45 U$5.P$1 62.31,25.45 51.36,36.4 44.65,36.4 43.55,37.5 v43.5,37.5 | v35.74,37.27 35.25,37.76 U1.27
  Bottom 0.3: v35.74,37.27 36.61,36.4 42.35,36.4 43.45,37.5 v43.5,37.5
SS7
  Top 0.3: R13.2 23.65,72.75 24.3,72.09 24.3,70.05 23.55,69.3 U$7.P$1 23.55,57.95 26,55.5 26,52.8 29.41,49.39 29.41,45.29 29.18,45.05 U1.8
SS8  (via drill 0.35)
  Top 0.3: R14.2 19.7,73.35 19.7,72.8 20.3,72.2 20.3,70.05 19.55,69.3 U$9.P$1 19.55,68.75 19.57,68.72 19.57,67.38 21.5,65.45 21.5,59.29 25.5,55.29 25.5,50.83 v27,49.33 | v26.8,44.5 26.85,44.55 U1.9
  Bottom 0.3: v26.8,44.5 27,44.7 v27,49.33
SS9  (via drill 0.35)
  Top 0.3: R18.2 73.25,13.35 72.69,12.8 70.5,12.8 69.85,13.45 U$10.P$1 67.42,15.43 67.42,18.22 50.74,34.9 44.09,34.9 43.54,34.35 v43.51,34.35 | U1.24 33.75,37.95 v33.48,37.67
  Bottom 0.3: v33.48,37.67 33.48,37.38 33.03,36.94 33.03,36.3 34.43,34.9 42.9,34.9 43.45,34.35 v43.51,34.35
SS10  (via drill 0.35)
  Top 0.3: R19.2 73.25,17.35 72.69,16.8 70.5,16.8 69.85,17.45 U$11.P$1 68.9,17.45 50.95,35.4 v43.49,35.4 | U1.25 34.25,37.08 33.81,36.63 v33.81,36.62
  Bottom 0.3: v33.81,36.62 35.03,35.4 v43.49,35.4
SWC  (via drill 0.35)
  Top 0.3: R3.1 38.8,52.8 37.75,51.75 U1.49 38.67,50.47 v38.7,50.5
  Bottom 0.3: U$12.P$10 6,63 8.3,60.7 27.1,60.7 37.3,50.5 v38.7,50.5
SWD  (via drill 0.35)
  Top 0.3: R2.1 43.31,46.5 42.26,47.55 U1.46 38.82,47.55 38.2,46.93 v38.2,46.83
  Bottom 0.3: v38.2,46.83 37.77,47.25 37.77,49.32 26.9,60.2 8.09,60.2 7.29,61 U$12.P$8
TIME-ES  (via drill 0.35)
  Top 0.3: BSK1.8 39.22,11.01 41.01,11.01 43.26,13.26 43.26,26.05 39.05,30.26 39.05,37.2 v38.9,37.35 | v32.3,37.6 32.3,37.83 32.75,38.28 U1.22
  Bottom 0.3: v32.3,37.6 33.15,38.45 35.66,38.45 36.76,37.35 v38.9,37.35
TIME-G  (via drill 0.35)
  Top 0.3: U1.59 32.75,49.27 v33.02,49 | GPS.P$1 78.37,43.91 73.94,43.91 72.97,42.95 72.97,42.34 72.32,41.69 71.4,41.69 70.75,42.34 70.75,43.2 68.25,45.7 56.01,45.7 54.91,44.6 41.85,44.6 v41.26,44 | v30,43.5 29.41,42.91 29.41,42.29 29.18,42.05 U1.14 | U1.23 33.25,42.66 v34.5,43.91 34.92,43.48 34.92,42.77 v35.48,42.22
  Bottom 0.3: v33.02,49 33.02,48.48 34.5,47 v34.5,43.91 34.09,43.5 v30,43.5 | v35.48,42.22 35.87,41.83 39.08,41.83 v41.26,44
TX-S  (via drill 0.35)
  Top 0.3: v37,49 36.75,49.25 U1.51
  Bottom 0.3: v37,49 37,49.39 26.69,59.7 7.99,59.7 7.29,59 U$12.P$6

## Text on the board
bNames: to BSK3